# Altium PCB AT90PWM_PCB_Diff.PcbDoc
Units mm, origin at the board's own origin, x right, y up, seen from the top; angles counter-clockwise.
Board outline 45 x 35 mm, 4 copper layers (Top Layer, Internal Plane 1, Internal Plane 2, Bottom Layer); 8 components, 19 nets, 64 pads, 2 vias.
Unrouted connection lines stored in the file: 6.
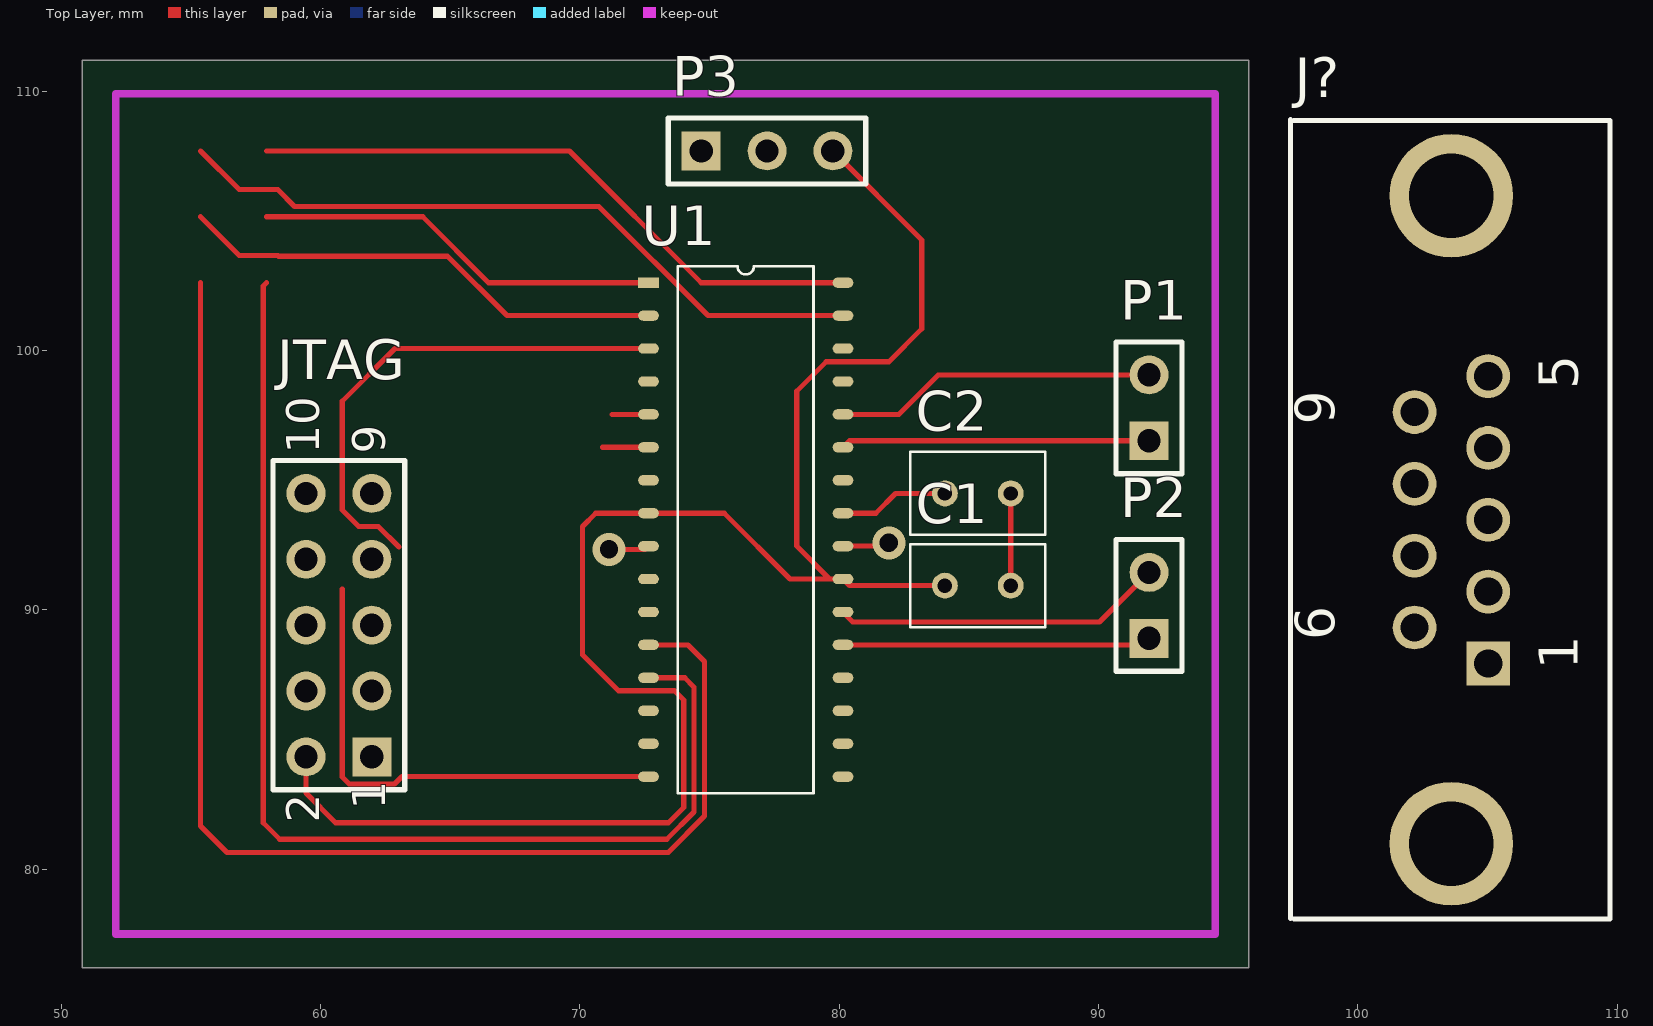
[diagram p0: Top Layer view]
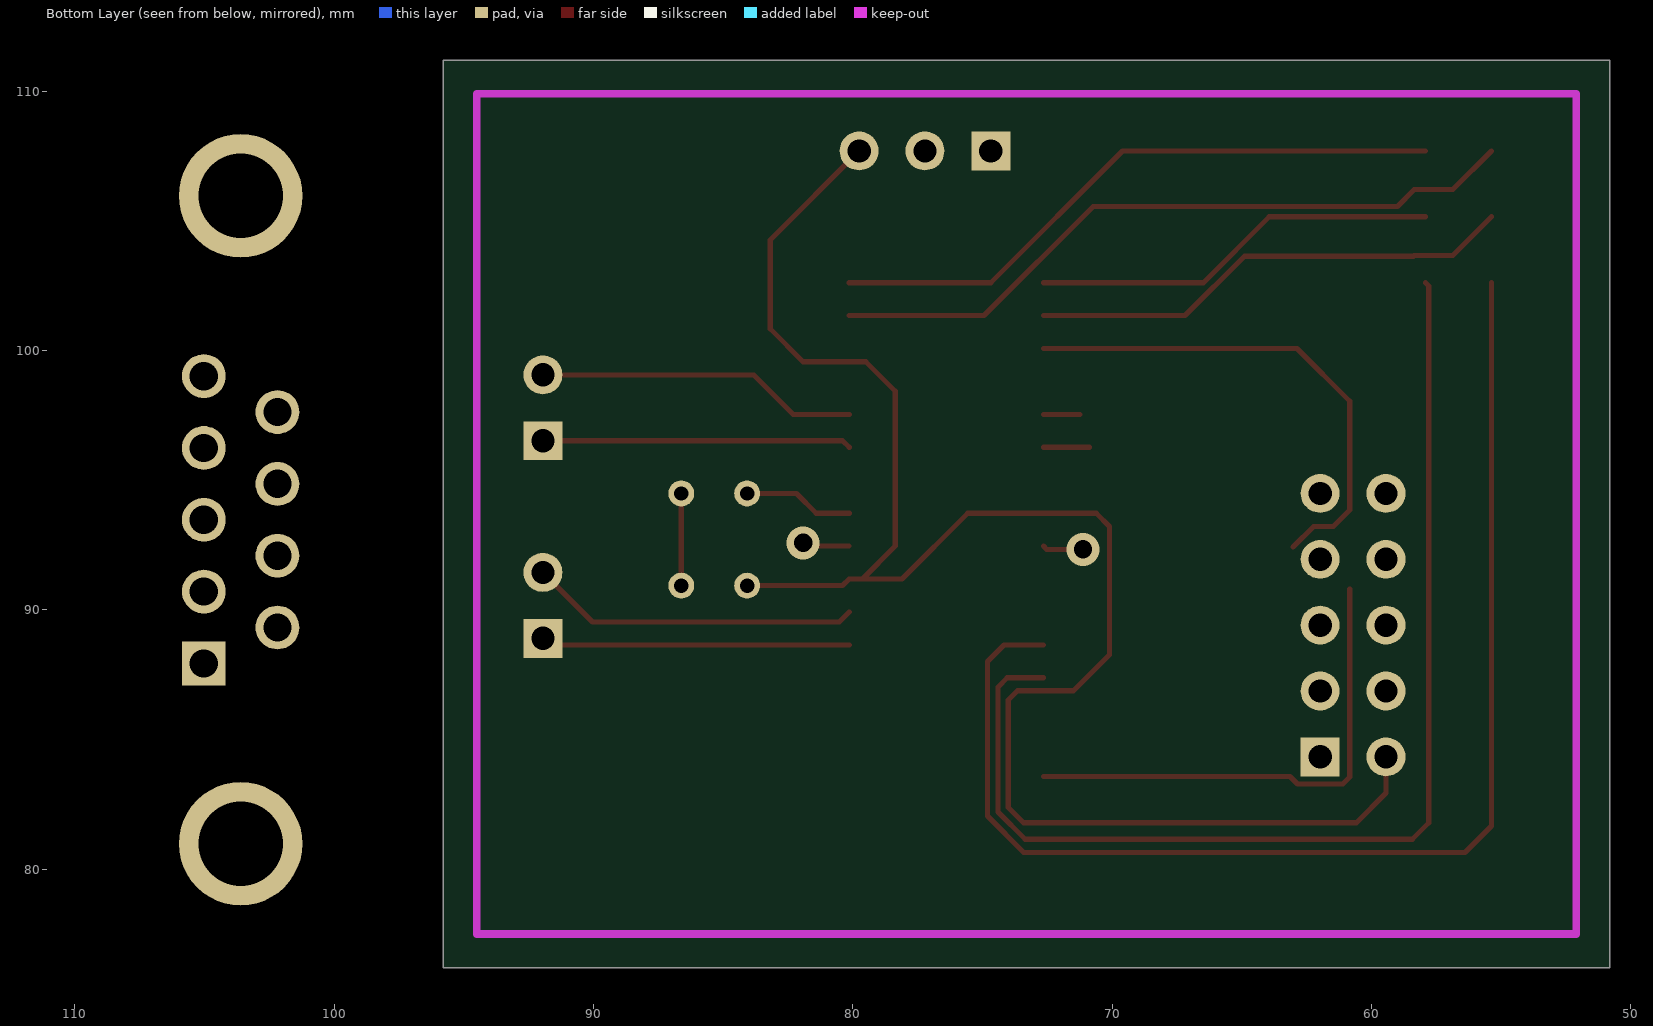
[diagram p1: Bottom Layer view, seen from below]
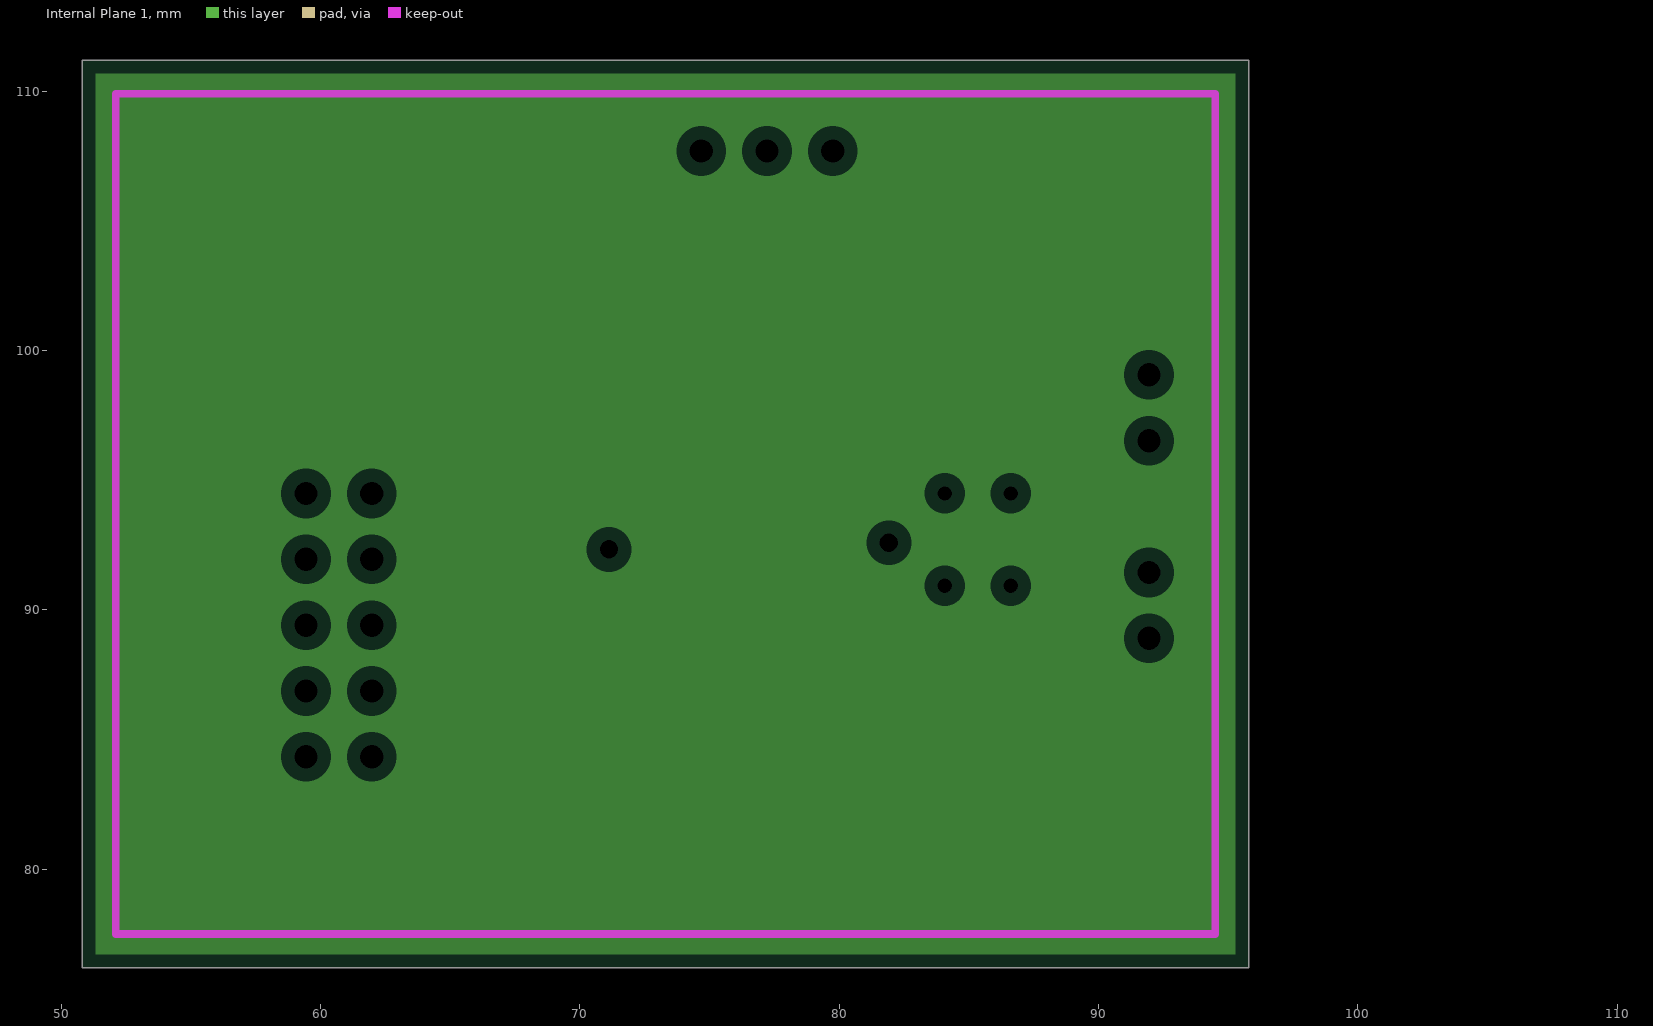
[diagram p2: Internal Plane 1, clearances drawn from the general rule]
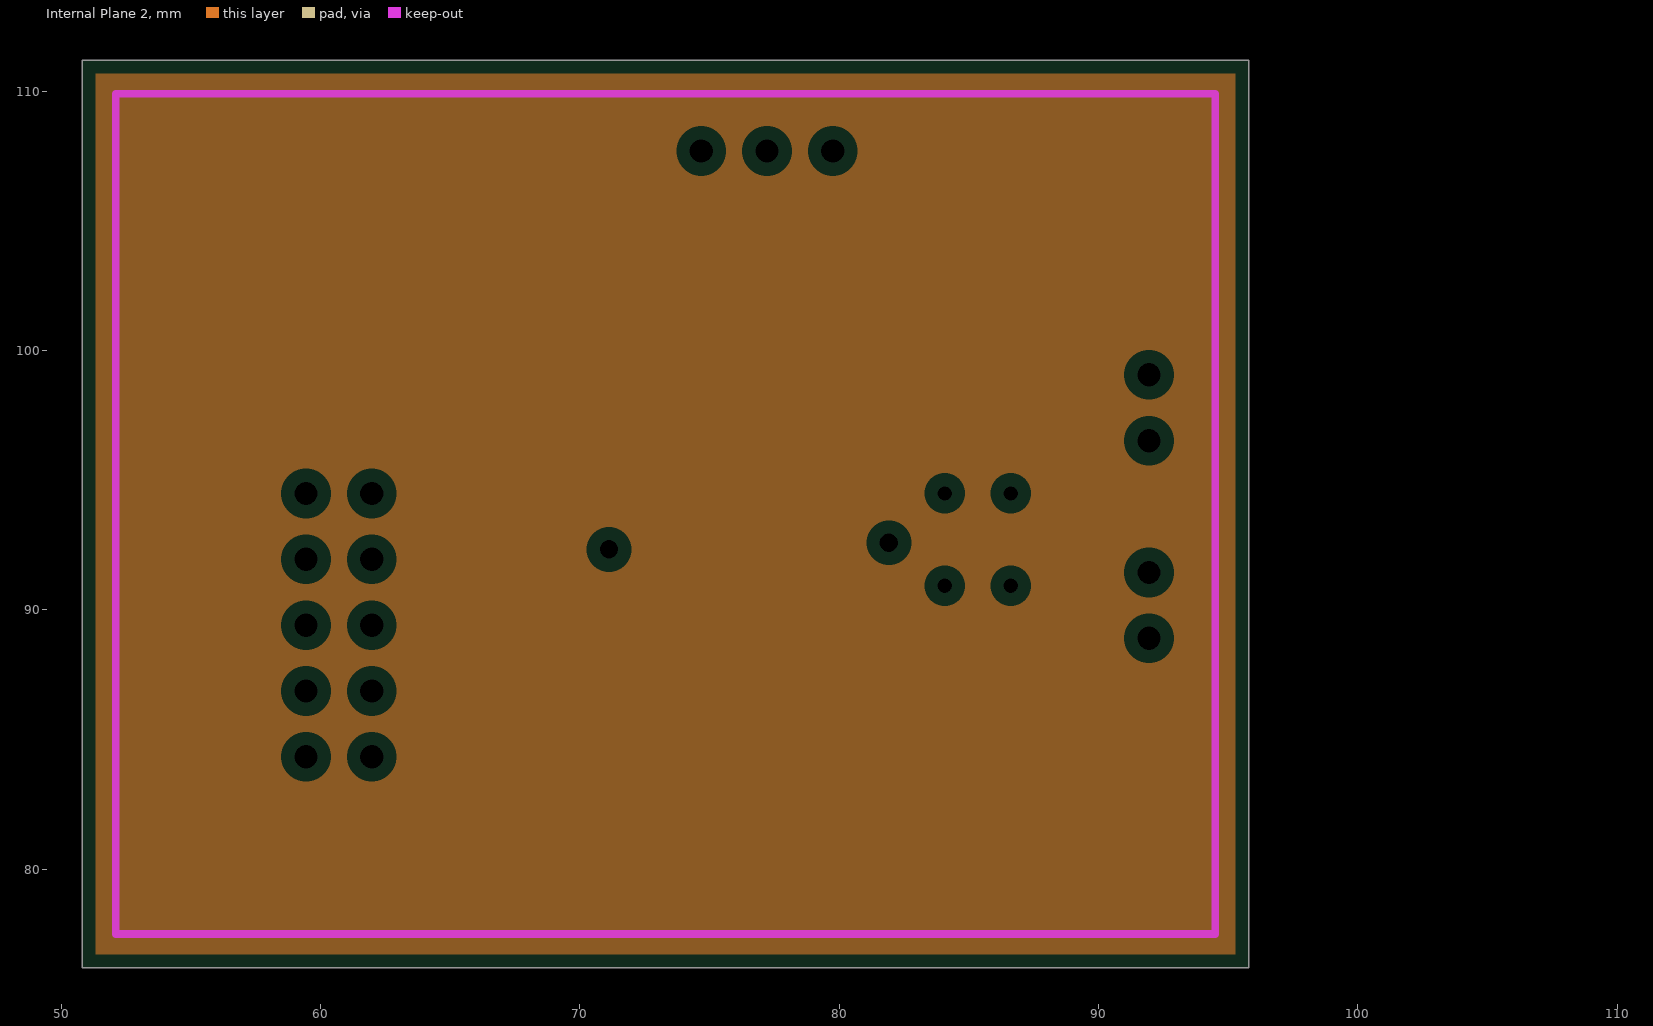
[diagram p3: Internal Plane 2, clearances drawn from the general rule]

## Layer stack, top to bottom
Top Layer: signal copper 0.0356
Dielectric: dielectric 0.32, FR-4, Dk 4.8
Internal Plane 1: plane copper 0.0356
Dielectric: dielectric 0.32, FR-4, Dk 4.8
Internal Plane 2: plane copper 0.0356
Dielectric: dielectric 0.32, FR-4, Dk 4.8
Bottom Layer: signal copper 0.0356

## Board outline
50.8,76.2 95.8,76.2 95.8,111.2 50.8,111.2

## Design rules (kind name [scope] priority, off if disabled: settings)
Clearance [All] p1: gap=0.2
PlaneClearance [All] p1: clearance=0.508
PlaneConnect [All] p1: planeconnectstyle=Relief reliefexpansion=0.508 reliefentries=4 reliefconductorwidth=0.254 reliefairgap=0.254
PolygonConnect [All] p1: connectstyle=Relief reliefconductorwidth=0.254 reliefentries=4 polygonreliefangle="90 Angle"
RoutingVias [All] p1: holewidth=0.6 width=1 viastyle="Through Hole" minholewidth=0.711 minwidth=1.27 maxholewidth=0.711 maxwidth=1.27
SilkscreenOverComponentPads [All] p1: minsilkscreentomaskgap=0.254
SolderMaskExpansion [All] p1: expansion=0.102
Width [All] p1: maxlimit=0.2 minlimit=0.2 preferedwidth=0.2
25 further rules are at their usual default settings.

## Components (designator, comment, footprint, x,y, rotation, side; value= is the part's Value field where it differs from the comment)
C1 "Cap" NPolar_Cap 85.344,90.932 r180 top
C2 "Cap" NPolar_Cap 85.344,94.488 r180 top
J? "D Connector 9" DSUB1.385-2H9 103.632,93.472 r90 top
JTAG "Header 5X2" HDR2X5 61.976,84.328 r90 top
P1 "Header 1" HDR1X2 91.948,96.52 r90 top
P2 "Header 2" HDR1X2 91.948,88.9 r90 top
P3 "Header 3" HDR1X3 74.676,107.696 r0 top
U1 "AT90PWM3" AT90PWM3B 72.644,102.616 r0 top

## Footprints (in the part's own frame and the unit in brackets; to place one, negate y for a bottom-side part, rotate by r counter-clockwise, add the part's x,y. Pads: shape width x height; smd on the part's side, far side on the other; paste and mask are expansions set on the pad)
AT90PWM3B [mm]
  rect 0.8x0.4 smd: 1(0,0)
  oval 0.8x0.4 smd: 2(0,-1.27) 3(0,-2.54) 4(0,-3.81) 5(0,-5.08) 6(0,-6.35) 7(0,-7.62) 8(0,-8.89) 9(0,-10.16) 10(0,-11.43) 11(0,-12.7) 12(0,-13.97) 13(0,-15.24) 14(0,-16.51) 15(0,-17.78) 16(0,-19.05) 17(7.5,-19.05) 18(7.5,-17.78) 19(7.5,-16.51) 20(7.5,-15.24) 21(7.5,-13.97) 22(7.5,-12.7) 23(7.5,-11.43) 24(7.5,-10.16) 25(7.5,-8.89) 26(7.5,-7.62) 27(7.5,-6.35) 28(7.5,-5.08) 29(7.5,-3.81) 30(7.5,-2.54) 31(7.5,-1.27) 32(7.5,0)
  silkscreen extent 1.13,-19.68 6.37,0.64
DSUB1.385-2H9 [mm] "Connector; D Subminiature; 9 Position; Right Angle; Pitch 1.385 mm"
  rect 1.69x1.69 hole 1.09: 1(-5.54,-1.395)
  round 1.69 hole 1.09: 2(-2.77,-1.395) 3(0,-1.395) 4(2.77,-1.395) 5(5.54,-1.395) 6(-4.155,1.445) 7(-1.385,1.445) 8(1.385,1.445) 9(4.155,1.445)
  round 4.76 hole 3.26: 10(-12.495,0.025) 11(12.495,0.025)
  silkscreen extent -15.4,-6.09 15.43,6.22
HDR1X2 [mm] "Connector; Header; 2 Position"
  rect 1.5x1.5 hole 0.9: 1(0,0)
  round 1.5 hole 0.9: 2(2.54,0)
  silkscreen extent -1.27,-1.27 3.81,1.27
HDR1X3 [mm] "Connector; Header; 3 Position"
  rect 1.5x1.5 hole 0.9: 1(0,0)
  round 1.5 hole 0.9: 2(2.54,0) 3(5.08,0)
  silkscreen extent -1.27,-1.27 6.35,1.27
HDR2X5 [mm] "Connector; Header; 5x2 Position"
  rect 1.5x1.5 hole 0.9: 1(0,0)
  round 1.5 hole 0.9: 2(0,2.54) 3(2.54,0) 4(2.54,2.54) 5(5.08,0) 6(5.08,2.54) 7(7.62,0) 8(7.62,2.54) 9(10.16,0) 10(10.16,2.54)
  silkscreen extent -1.27,-1.27 11.43,3.81
NPolar_Cap [mm]
  round 1 hole 0.55: 1(-1.27,0) 2(1.27,0)
  silkscreen extent -2.6,-1.6 2.6,1.6

## Part data
C1 C2: "Capacitor"
J?: "Receptacle Assembly, 9 Position, Right Angle"
JTAG: "Header, 5-Pin, Dual row"
P1: library part "Header 2", "Header, 2-Pin"
P2: "Header, 2-Pin"
P3: "Header, 3-Pin"

## Via types
v1: diameter 1.27, hole 0.711, Top Layer to Bottom Layer, 2 vias

## Nets (pads, with @x,y where several pads share a name; then routed paths per layer and width w, separated by ;. In a path a pad name is that pad's centre, name@x,y a point inside that pad or via, vN(x,y) a via of type N, cw(c..) or ccw(c..) an arc to the next point about the centre after c; other vN are vias at no path point)
5V: C1.2 JTAG.4 U1.8 U1.23 | length 67.6
  Top Layer w0.2: 59.436,84.328 59.436,82.931 60.579,81.788 73.418,81.788 74.003,82.373 74.003,86.525 73.652,86.876 71.493,86.876 70.104,88.265 70.104,93.218 70.612,93.726 U1.8 75.565,93.726 78.105,91.186 79.629,91.186 ; 79.756,107.696 83.185,104.267 83.185,100.838 81.915,99.568 79.502,99.568 78.359,98.425 78.359,92.456 79.629,91.186 ; U1.23 U1.23@80.137,91.186 ; C1.2 80.391,90.932 U1.23@80.137,91.186 ; 79.629,91.186 U1.23@80.137,91.186
\R\E\S\E\T\: JTAG.6 U1.3 | length 19.6
  Top Layer w0.2: 63.026,92.417 62.225,93.218 61.468,93.218 60.833,93.853 60.833,98.044 62.865,100.076 U1.3
AGND: C1.1 C2.1 P3.2 U1.24 | length 5.2
  Top Layer w0.2: U1.24 v1@81.788,92.456 ; C1.1 C2.1
  other v1: 81.915,92.583
DGND: JTAG.2 P3.1 U1.9 | length 1.6
  Top Layer w0.2: v1(71.12,92.329) 72.517,92.329 U1.9
ISEN_1: P1.2 U1.28 | length 12.4
  Top Layer w0.2: U1.28@80.137,97.536 U1.28 82.296,97.536 83.82,99.06 P1.2
ISEN_2: P2.2 U1.22 | length 12.8
  Top Layer w0.2: U1.22@80.137,89.916 80.518,89.535 90.043,89.535 P2.2
MISO_A: JTAG.3 U1.5 | length 1.4
  Top Layer w0.2: 71.247,97.536 U1.5
MOSI_A: JTAG.9 U1.6 | length 1.8
  Top Layer w0.2: 70.866,96.266 U1.6
NetC2_2: C2.2 U1.25 | length 4.3
  Top Layer w0.2: U1.25@80.137,93.726 U1.25 81.407,93.726 82.169,94.488 C2.2
SCK_A: JTAG.1 U1.16 | length 19.3
  Top Layer w0.2: 60.833,90.805 60.833,83.547 61.102,83.278 62.85,83.278 63.138,83.566 U1.16
SEN_GND1: P1.1 U1.27 | length 11.9
  Top Layer w0.2: U1.27@80.137,96.266 80.391,96.52 P1.1
SEN_GND2: P2.1 U1.21 | length 11.9
  Top Layer w0.2: U1.21@80.137,88.646 U1.21 91.694,88.646 P2.1
UH: U1.1 | length 15.8
  Top Layer w0.2: 57.912,105.156 63.939,105.156 66.479,102.616 U1.1
UL: U1.32 | length 24.3
  Top Layer w0.2: 57.912,107.696 69.596,107.696 74.676,102.616 U1.32
VFO: U1.7
VH: U1.2 | length 18.9
  Top Layer w0.2: 55.372,105.156 56.862,103.666 58.347,103.666 58.381,103.632 64.897,103.632 67.183,101.346 U1.2
VL: U1.31 | length 27.4
  Top Layer w0.2: 55.372,107.696 56.862,106.206 58.347,106.206 58.997,105.556 70.728,105.556 74.938,101.346 U1.31
WH: U1.12 | length 49.8
  Top Layer w0.2: 55.372,102.616 55.372,81.661 56.388,80.645 73.406,80.645 74.803,82.042 74.803,88.011 74.168,88.646 U1.12
WL: U1.13 | length 44.9
  Top Layer w0.2: 57.912,102.616 57.785,102.489 57.785,81.788 58.42,81.153 73.348,81.153 74.403,82.208 74.403,87.014 74.041,87.376 U1.13
pads on no net: J?.1 J?.2 J?.3 J?.4 J?.5 J?.6 J?.7 J?.8 J?.9 J?.10 J?.11 JTAG.5 JTAG.7 JTAG.8 JTAG.10 P3.3 U1.4 U1.10 U1.11 U1.14 U1.15 U1.17 U1.18 U1.19 U1.20 U1.26 U1.29 U1.30

## Polygon pours and split planes (outlines as drawn)
no net on Internal Plane 1 (split plane): 95.29,76.71 51.31,76.71 51.31,110.69 95.29,110.69
no net on Internal Plane 2 (split plane): 95.29,76.71 51.31,76.71 51.31,110.69 95.29,110.69

## Keep-outs
Keep-Out Layer:
  lines w0.3: 52.1,77.5 94.5,77.5 94.5,109.9 52.1,109.9 52.1,77.5

## Silkscreen, mask and mechanical layers (free items; w line width, h text height)
Drill Drawing:
  text ".LEGEND" at 100.88,81.28 h1.52
  text "Drill Drawing." at 100.88,78.74 h1.52

## Dimensions
52.1,77.5 to 94.5,77.5 on Mechanical 1
52.1,77.5 to 52.1,109.9 on Mechanical 1

## Text inside footprints (layer, text, board x,y; h text height)
J?: Top Overlay "1" at 108.482,87.682 h1.5 r90; Top Overlay "5" at 108.482,98.512 h1.5 r90; Top Overlay "9" at 99.082,97.127 h1.5 r90; Top Overlay "6" at 99.082,88.817 h1.5 r90
JTAG: Top Overlay "2" at 59.944,81.788 h1.27 r90; Top Overlay "1" at 62.484,82.296 h1.27 r90; Top Overlay "9" at 62.484,96.012 h1.27 r90; Top Overlay "10" at 59.944,96.012 h1.27 r90